# Altium PCB ss-sece.PcbDoc
Units mm, origin at the board's own origin, x right, y up, seen from the top; angles counter-clockwise.
Board outline 74.93 x 91.19 mm, 2 copper layers (Top Layer, Bottom Layer); 61 components, 46 nets, 218 pads, 29 vias.
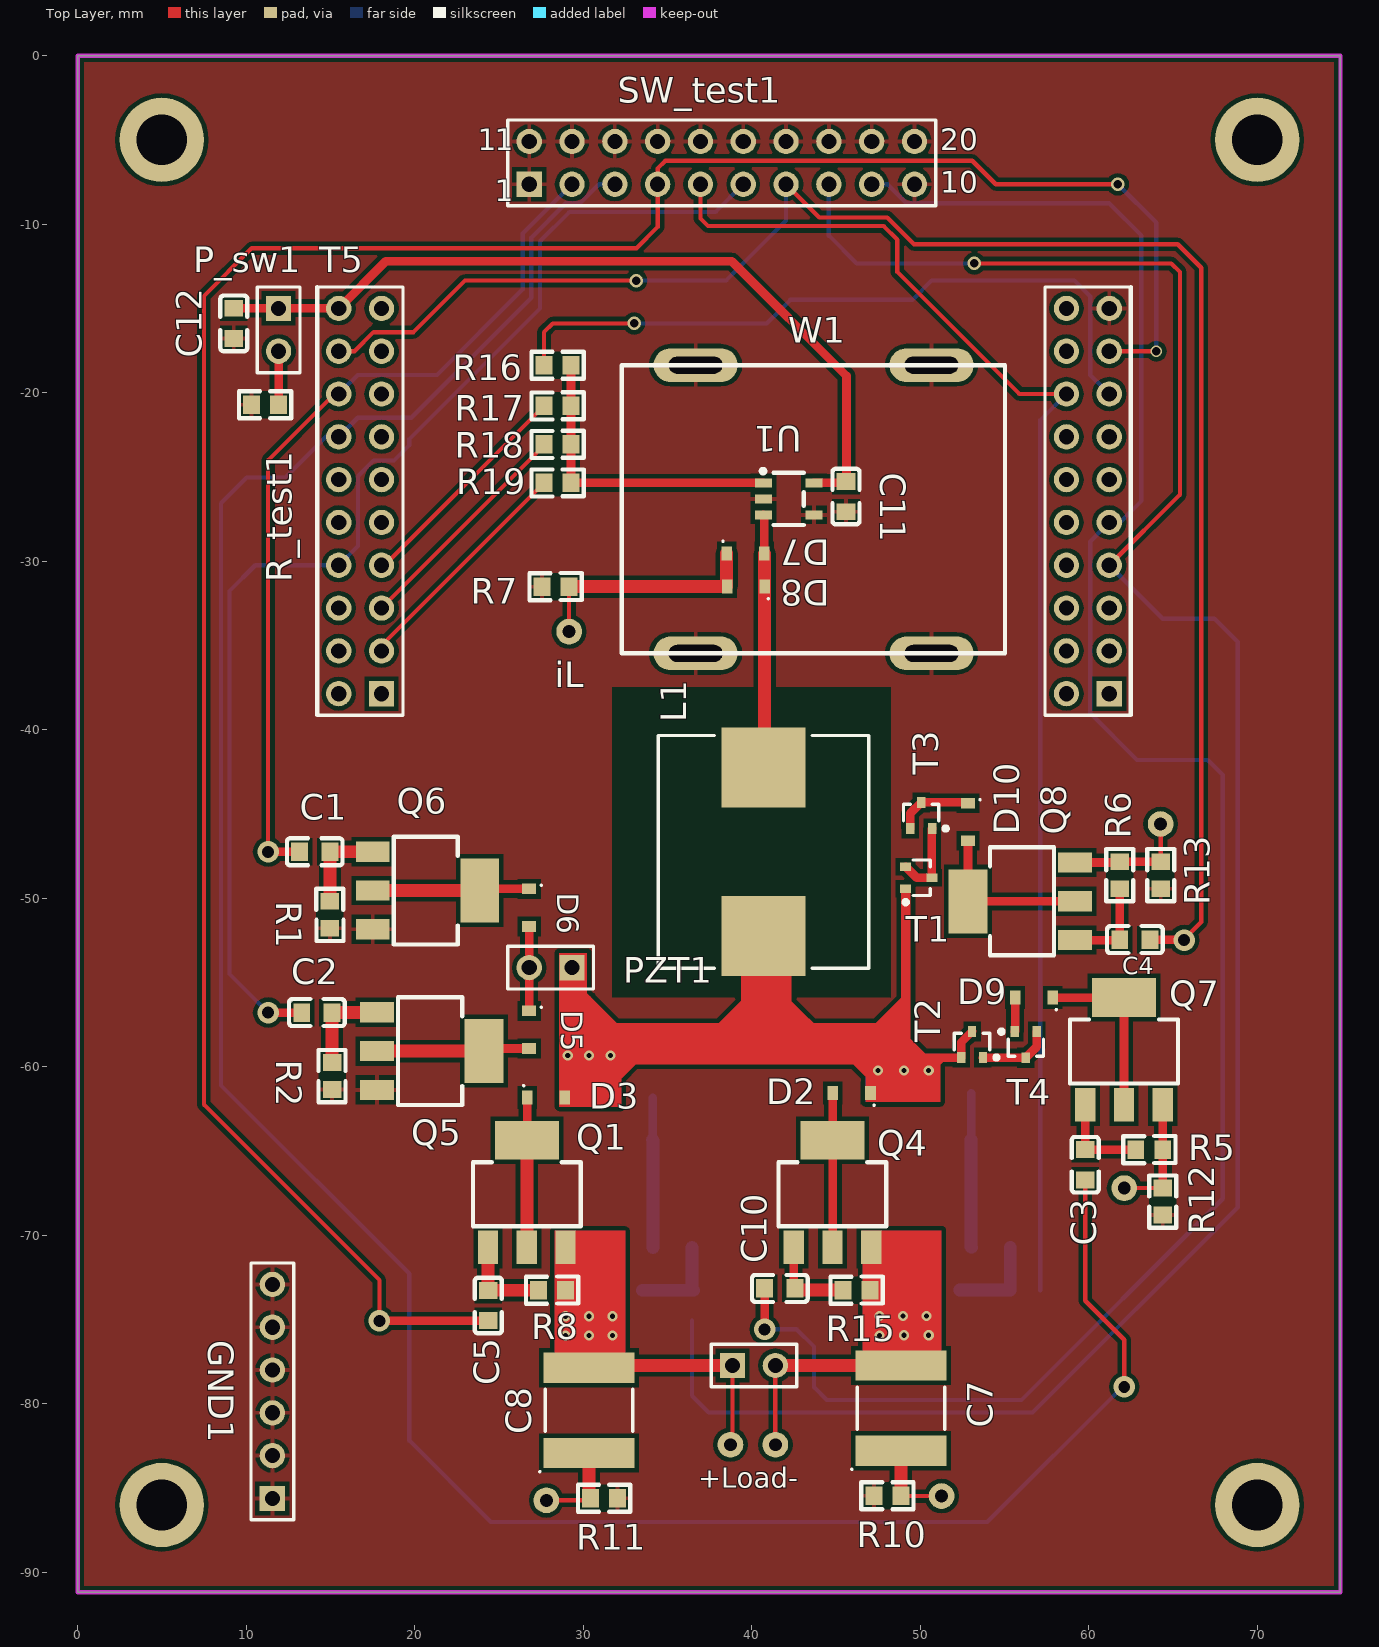
[diagram p0: Top Layer view]
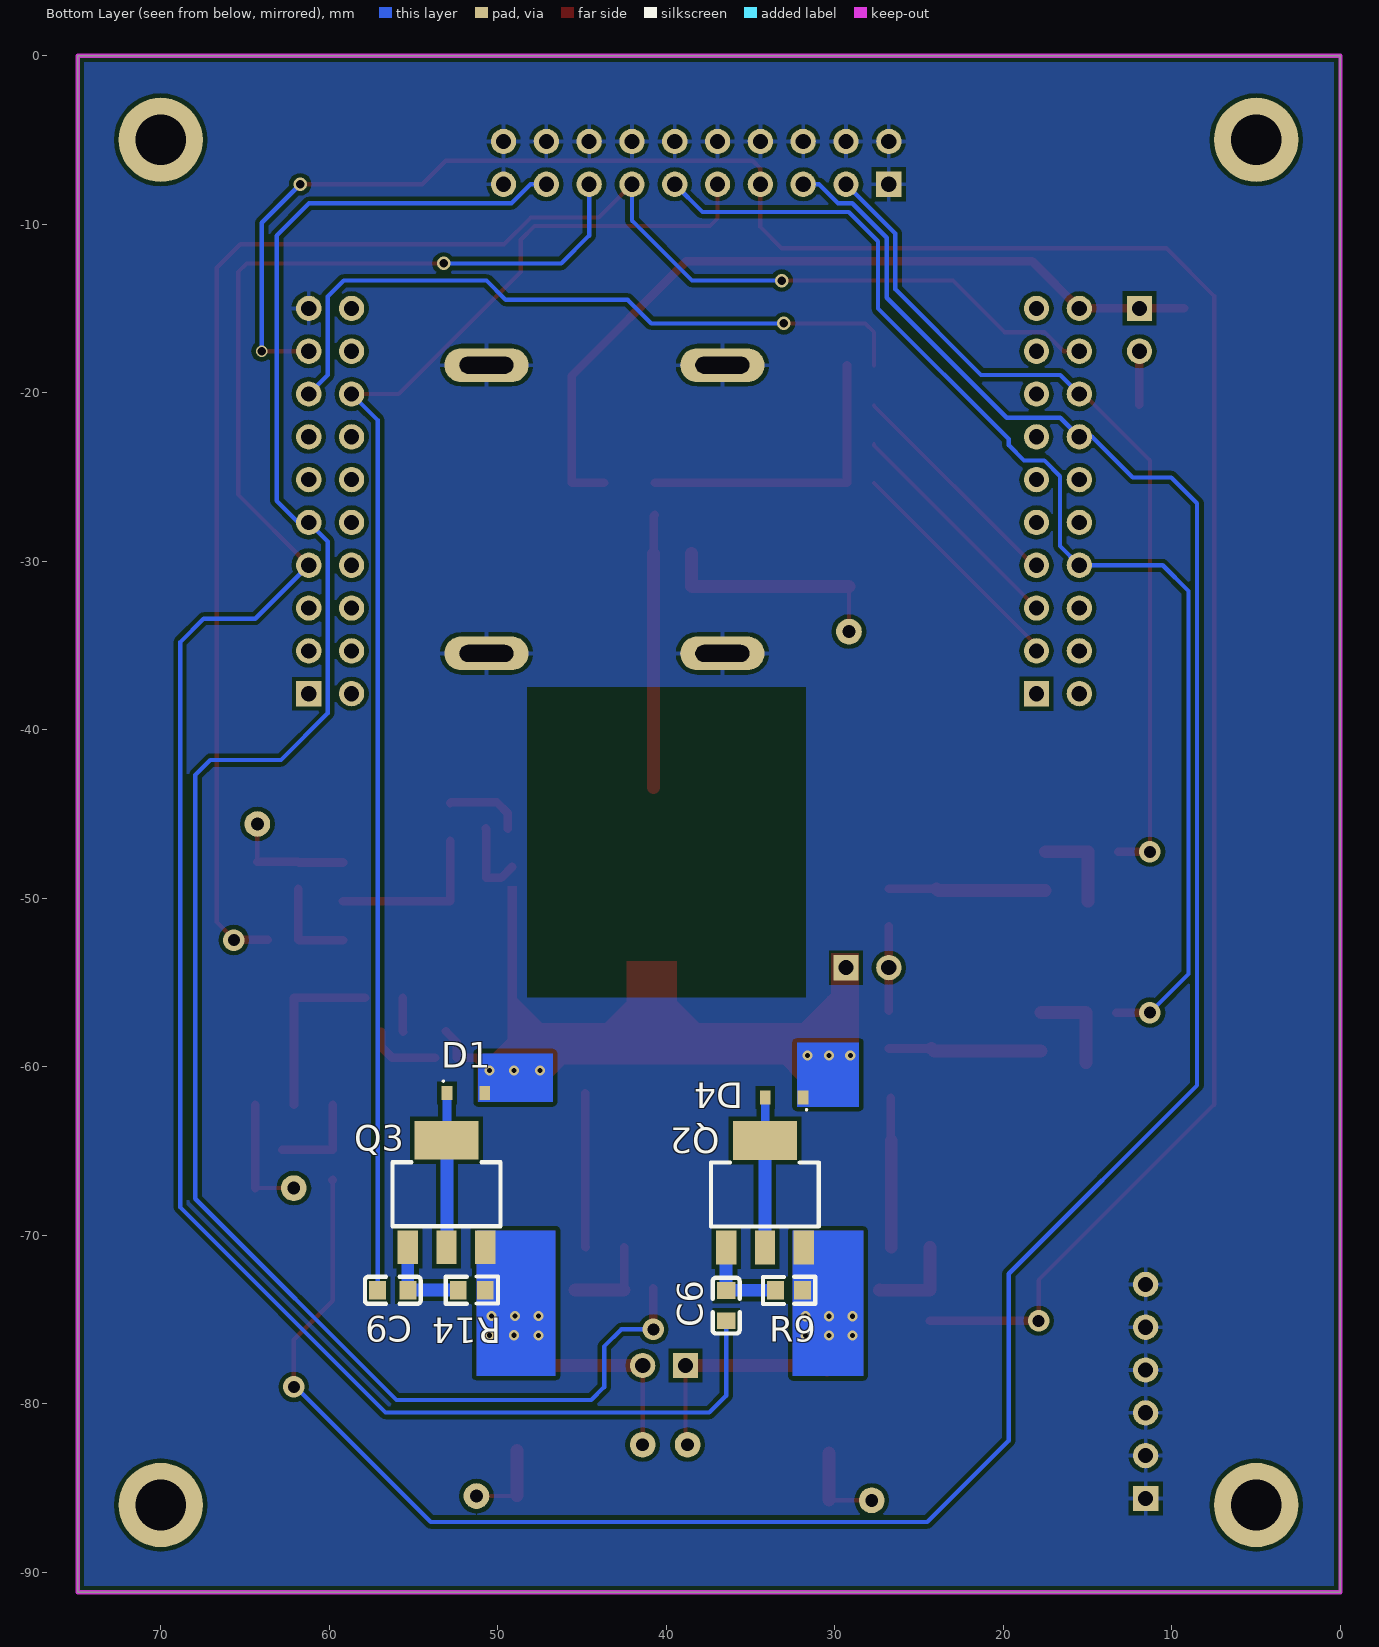
[diagram p1: Bottom Layer view, seen from below]

## Layer stack, top to bottom
Top Solder: solder mask 0.0102, Solder Resist, Dk 3.5
Top Layer: signal copper 0.0356
Dielectric 1: dielectric 0.32, FR-4, Dk 4.8
Bottom Layer: signal copper 0.0356
Bottom Solder: solder mask 0.0102, Solder Resist, Dk 3.5

## Board outline
0,-91.186 74.93,-91.186 74.93,0 0,0

## Design rules (kind name [scope] priority, off if disabled: settings)
Clearance [All] p1: gap=0.254 ignorepadtopadclearanceinfootprint=FALSE except(0: Arc-Hole Track-Hole SMDPad-Hole THPad-Hole Via-Hole Fill-Hole Poly-Hole Region-Hole Text-Hole)
PolygonConnect [All] p1: connectstyle=Relief reliefconductorwidth=0.254 reliefentries=4 polygonreliefangle="90 Angle" airgapwidth=0.254
RoutingVias [All] p1: holewidth=0.711 width=1.27 viastyle="Through Hole" minholewidth=0.2 minwidth=0.4 maxholewidth=0.711 maxwidth=1.27
SolderMaskExpansion [All] p1: expansion=0.102
Width [All] p1: maxlimit=1.27 minlimit=0.254 preferedwidth=0.254 minimp=50.000000 maximp=50.000000 favimp=50.000000
30 further rules are at their usual default settings.

## Components (designator, comment, footprint, x,y, rotation, side; value= is the part's Value field where it differs from the comment)
C1 "2.2n" C0603 14.072,-47.244 r0 top
C2 "2.2n" C0603 14.199,-56.783 r0 top
C3 "2.2n" C0603 59.789,-65.811 r90 top
C4 "2.2n" C0603 62.735,-52.451 r180 top
C5 "2.2n" C0603 24.37,-74.163 r90 top
C6 "2.2n" C0603 36.449,-74.171 r90 bottom
C7 "0.1u" Cap2220 48.85,-80.248 r90 top
C8 "0.1u" Cap2220 30.339,-80.39 r90 top
C9 "2.2n" C0603 56.227,-73.263 r180 bottom
C10 "2.2n" C0603 41.667,-73.151 r0 top
C11 "0.1u" C0603 45.593,-26.165 r270 top
C12 "0.1u" C0603 9.271,-15.889 r270 top
D1 "NSR0240H" SOD-323 51.898,-61.564 r180 bottom
D2 "NSR0240H" SOD-323 45.929,-61.564 r180 top
D3 "NSR0240H" SOD-323 27.799,-61.833 r0 top
D4 "NSR0240H" SOD-323 33.006,-61.833 r0 bottom
D5 "NSR0240H" SOD-323 26.797,-57.799 r270 top
D6 "NSR0240H" SOD-323 26.797,-50.56 r270 top
D7 "NSR0240H" SOD-323 39.624,-29.529 r0 top
D8 "NSR0240H" SOD-323 39.652,-31.51 r180 top
D9 "NSR0240H" SOD-323 56.741,-55.894 r180 top
D10 "NSR0240H" SOD-323 52.832,-45.48 r270 top
GND1 "Header 6" HDR1X6 11.557,-85.612 r90 top
L1 "120uH" 120uH 40.692,-47.244 r90 top
Load1 "Header 2" HDR1X2 38.862,-77.724 r0 top
P_sw1 "Header 2" HDR1X2 11.924,-15 r270 top
PZT1 "Header 2" HDR1X2 29.337,-54.116 r180 top
Q1 "ZVN4424GTA" SOT-223-4_L6.5-W3.5-P2.30-LS7.0-BR 26.656,-67.533 r270 top
Q2 "ZVP4424GTA" SOT-223-4_L6.5-W3.5-P2.30-LS7.0-BR 34.149,-67.548 r270 bottom
Q3 "ZVN4424GTA" SOT-223-4_L6.5-W3.5-P2.30-LS7.0-BR 53.041,-67.533 r270 bottom
Q4 "ZVP4424GTA" SOT-223-4_L6.5-W3.5-P2.30-LS7.0-BR 44.786,-67.533 r270 top
Q5 "ZVP4424GTA" SOT-223-4_L6.5-W3.5-P2.30-LS7.0-BR 20.941,-59.069 r180 top
Q6 "ZVN4424GTA" SOT-223-4_L6.5-W3.5-P2.30-LS7.0-BR 20.687,-49.544 r180 top
Q7 "ZVN4424GTA" SOT-223-4_L6.5-W3.5-P2.30-LS7.0-BR 62.089,-59.069 r270 top
Q8 "ZVP4424GTA" SOT-223-4_L6.5-W3.5-P2.30-LS7.0-BR 56.007,-50.179 r0 top
R1 "10M" R0603 14.972,-50.979 r90 top
R2 "10M" R0603 15.099,-60.555 r90 top
R5 "10M" R0603 63.589,-64.911 r180 top
R6 "10M" R0603 61.835,-48.631 r270 top
R7 "0" R0603 28.363,-31.51 r0 top
R8 "10M" R0603 28.156,-73.248 r180 top
R9 "10M" R0603 32.714,-73.263 r0 bottom
R10 "0" R0603 48.05,-85.455 r0 top
R11 "0" R0603 31.242,-85.598 r180 top
R12 "0" R0603 64.389,-67.997 r90 top
R13 "0" R0603 64.27,-48.631 r90 top
R14 "10M" R0603 51.541,-73.248 r0 bottom
R15 "10M" R0603 46.221,-73.248 r180 top
R16 "0" R0603 28.476,-18.368 r180 top
R17 "0" R0603 28.476,-20.781 r180 top
R18 "0" R0603 28.476,-23.067 r180 top
R19 "0" R0603 28.476,-25.353 r180 top
R_test1 "1k" R0603 11.124,-20.715 r180 top
SW_test1 "Header 10X2A" HDR2X10_CEN 26.797,-7.634 r0 top
T1 "2SC4083" "SOT 323" 49.911,-48.782 r0 top
T2 "2SC4083" "SOT 323" 53.071,-58.675 r90 top
T3 "2SC4083" "SOT 323" 50.053,-45.086 r90 top
T4 "2SC4083" "SOT 323" 56.261,-58.688 r270 top
T5 "TM4C_socket" Tm4c_socket 14.224,-13.73 r0 top locked
U1 "TLV3201AIDBVR" SOT-23-5_L3.0-W1.7-P0.95-LS2.8-BR 42.192,-26.303 r180 top
W1 "L22*W17*H6" L22*W17*H6 55.023,-35.468 r180 top locked

## Footprints (in the part's own frame and the unit in brackets; to place one, negate y for a bottom-side part, rotate by r counter-clockwise, add the part's x,y. Pads: shape width x height; smd on the part's side, far side on the other; paste and mask are expansions set on the pad)
120uH [mm] "Precision Wire Wound Inductor, 2-Leads, Body 13.80x12.50mm, IPC Medium Density"
  rect 4.75x5 smd: 1(-5,0) 2(5,0)
  silkscreen extent -6.9,-6.25 6.9,6.25, body extent -6.9,-6.25 6.9,6.25, height 6
C0603 [mm]
  rect 1x1.1 smd: 1(-0.9,0) 2(0.9,0)
  silkscreen extent -1.65,-0.8 1.65,0.8
Cap2220 [mm]
  rect 1.8x5.4 smd: 1(-2.525,0) 2(2.525,0)
  silkscreen extent -3.69,-2.6 1.25,2.96, body extent -3.05,-2.7 3.05,2.7, height 3.3
HDR1X2 [mm] "Connector; Header; 2 Position"
  rect 1.5x1.5 hole 0.9: 1(0,0)
  round 1.5 hole 0.9: 2(2.54,0)
  silkscreen extent -1.27,-1.27 3.81,1.27
HDR1X6 [mm] "Connector; Header; 6 Position"
  rect 1.5x1.5 hole 0.9: 1(0,0)
  round 1.5 hole 0.9: 2(2.54,0) 3(5.08,0) 4(7.62,0) 5(10.16,0) 6(12.7,0)
  silkscreen extent -1.27,-1.27 13.97,1.27
HDR2X10_CEN [mm] "Connector; Header; 10x2 Position"
  rect 1.5x1.5 hole 0.9: 1(0,0)
  round 1.5 hole 0.9: 2(2.54,0) 3(5.08,0) 4(7.62,0) 5(10.16,0) 6(12.7,0) 7(15.24,0) 8(17.78,0) 9(20.32,0) 10(22.86,0) 11(0,2.54) 12(2.54,2.54) 13(5.08,2.54) 14(7.62,2.54) 15(10.16,2.54) 16(12.7,2.54) 17(15.24,2.54) 18(17.78,2.54) 19(20.32,2.54) 20(22.86,2.54)
  silkscreen extent -1.27,-1.27 24.13,3.81
L22*W17*H6 [mm]
  oval 5x2 hole 1 slot 3.2 at 0 deg: 1(4.35,0) 2(18.35,0) 3(18.35,-17.1) 4(4.35,-17.1)
  silkscreen extent 0,-17.1 22.73,0
R0603 [mm]
  rect 1x1.1 smd: 1(-0.8,0) 2(0.8,0)
  silkscreen extent -1.55,-0.8 1.55,0.81
SOD-323 [mm] "NSR0240H"
  rect 0.63x0.83 smd: 1(-1.115,0) 2(1.115,0)
  silkscreen extent -1.38,0.67 -1.28,0.76, body extent -0.9,-0.67 0.9,0.67, height 0.9
"SOT 323" [mm] "2SC4083T106N"
  rect 0.65x0.5 smd: 1(-0.775,-0.65) 2(-0.775,0.65) 3(0.775,0)
  silkscreen extent -0.9,-1.57 0.67,1.05, body extent -0.67,-1.05 0.67,1.05, height 1
SOT-23-5_L3.0-W1.7-P0.95-LS2.8-BR [mm]
  rect 1x0.55 smd: 1(1.5,-0.95) 2(1.5,0) 3(1.5,0.95) 4(-1.5,0.95) 5(-1.5,-0.95)
  silkscreen extent -0.9,-1.78 1.65,1.55
SOT-223-4_L6.5-W3.5-P2.30-LS7.0-BR [mm]
  rect 2x1.2 smd: 1(3.175,-2.3) 2(3.175,0) 3(3.175,2.3)
  rect 2.3x3.8 smd: 4(-3.175,0)
  silkscreen extent -1.87,-3.2 1.93,3.2
Tm4c_socket [mm]
  round 1.5 hole 0.9: 1(1.27,-1.27) 2(1.27,-3.81) 3(1.27,-6.35) 4(1.27,-8.89) 5(1.27,-11.43) 6(1.27,-13.97) 7(1.27,-16.51) 8(1.27,-19.05) 9(1.27,-21.59) 10(1.27,-24.13) 11(3.81,-1.27) 12(3.81,-3.81) 13(3.81,-6.35) 14(3.81,-8.89) 15(3.81,-11.43) 16(3.81,-13.97) 17(3.81,-16.51) 18(3.81,-19.05) 19(3.81,-21.59) 21(44.45,-1.27) 22(44.45,-3.81) 23(44.45,-6.35) 24(44.45,-8.89) 25(44.45,-11.43) 26(44.45,-13.97) 27(44.45,-16.51) 28(44.45,-19.05) 29(44.45,-21.59) 30(44.45,-24.13) 31(46.99,-1.27) 32(46.99,-3.81) 33(46.99,-6.35) 34(46.99,-8.89) 35(46.99,-11.43) 36(46.99,-13.97) 37(46.99,-16.51) 38(46.99,-19.05) 39(46.99,-21.59)
  rect 1.5x1.5 hole 0.9: 20(3.81,-24.13) 40(46.99,-24.13)
  silkscreen extent 0,-25.4 48.26,0

## Part data
C1 C2 C3 C4 C5 C6 C9 C10: library part 0.1u, Contributor=LCEDA_Lib, nameAlias=Value(F), spicePre=C, spiceSymbolName=C_0603_US
GND1: "Header, 6-Pin", LatestRevisionDate=17-Jul-2002, LatestRevisionNote="Re-released for DXP Platform.", Publisher="Altium Limited"
L1: library part 47uH, BOM_Manufacturer=FH, BOM_Manufacturer Part=VLU1012-470KB, BOM_Supplier=LCSC, BOM_Supplier Part=C142466, Contributor=LCSC, nameAlias=Inductance, spicePre=L, spiceSymbolName=VLU1012-470KB
Load1 P_sw1 PZT1: "Header, 2-Pin", LatestRevisionDate=17-Jul-2002, LatestRevisionNote="Re-released for DXP Platform.", Publisher="Altium Limited"
Q1 Q3 Q6 Q7: BOM_Manufacturer="Diodes Incorporated", BOM_Manufacturer Part=ZVP4424GTA, BOM_Supplier=LCSC, BOM_Supplier Part=C397967, Contributor=LCSC, spicePre=Q, spiceSymbolName=ZVP4424GTA
Q2 Q4 Q5 Q8: BOM_Manufacturer="Diodes Incorporated", BOM_Manufacturer Part=ZVP4424GTA, BOM_Supplier=LCSC, BOM_Supplier Part=C397967, Contributor=LCSC, spicePre=Q, spiceSymbolName=ZVP4424GTA
R1 R2 R5 R6 R7 R8 R9 R10 R11 R12 R13 R14 R15 R16 R17 R18 R19: library part 1k, Contributor=LCEDA_Lib, spicePre=R, spiceSymbolName=R_1206_US
SW_test1: "Header, 10-Pin, Dual row", LatestRevisionDate=17-Jul-2002, LatestRevisionNote="Re-released for DXP Platform.", Publisher="Altium Limited"
T5: library part Tm4c_socket
U1: BOM_LCSC Assembly=Yes, BOM_Manufacturer=TI, BOM_Manufacturer Part=TLV3201AIDBVR, BOM_Supplier=LCSC, BOM_Supplier Part=C105188, SMT Type=Extend, spicePre=U, spiceSymbolName=TLV3201AIDBVR
C7 C8 C11 C12: Contributor=LCEDA_Lib, nameAlias=Value(F), spicePre=C, spiceSymbolName=C_0603_US
R_test1: Contributor=LCEDA_Lib, spicePre=R, spiceSymbolName=R_1206_US

## Free pads (board coordinates)
  round 5 hole 3: 4(5,-86) 4(5,-5) 4(70,-86) 4(70,-5)
  round 1.524 hole 0.762: 5(29.163,-34.177) 6(27.813,-85.725) 6(51.263,-85.471) 7(38.735,-82.423) 8(41.402,-82.423) 8(62.103,-67.197) 8(64.262,-45.593)

## Via types
v1: diameter 0.6, hole 0.3, Top Layer to Bottom Layer, tented both sides, 18 vias
v2: diameter 1.27, hole 0.711, Top Layer to Bottom Layer, tented both sides, 6 vias
v3: diameter 0.8, hole 0.5, Top Layer to Bottom Layer, tented both sides, 3 vias
v4: diameter 0.7, hole 0.5, Top Layer to Bottom Layer, tented both sides, 1 vias
v5: diameter 0.8, hole 0.5, Top Layer to Bottom Layer, tented top, 1 vias

## Nets (pads, with @x,y where several pads share a name; then routed paths per layer and width w, separated by ;. In a path a pad name is that pad's centre, name@x,y a point inside that pad or via, vN(x,y) a via of type N, cw(c..) or ccw(c..) an arc to the next point about the centre after c; other vN are vias at no path point)
3.3V: C11.1 C12.1 P_sw1.1 T5.1 U1.5 | length 59.2
  Top Layer w0.508: C12.1 9.282,-15 P_sw1.1 P_sw1.1@11.902,-14.978 ; P_sw1.1@11.902,-14.978 14.13,-14.978 ; P_sw1.1@11.902,-14.978 14.13,-14.978 ; 14.13,-14.978 14.152,-15 T5.1 18.288,-12.206 38.817,-12.206 45.621,-19.01 ; C11.1@45.621,-25.353 45.621,-19.01 ; C11.1@45.621,-25.353 U1.5 C11.1@45.621,-25.353 ; C11.1@45.621,-25.353 45.621,-19.01
Det: D7.2 D8.1 L1.2 U1.3 | length 16.2
  Top Layer w0.508: U1.3 40.739,-27.3 D7.2 D7.2@40.767,-29.557
  Top Layer w0.762: L1.2@40.767,-43.434 D8.1 D7.2@40.767,-29.557
GND: C11.2 C12.2 GND1.1 GND1.2 GND1.3 GND1.4 GND1.5 GND1.6 Q5.3 Q6.3 R1.1 R2.1 R7.1 R10.1 R11.1 R12.1 R13.1 R_test1.2 SW_test1.1 SW_test1.10 SW_test1.11 SW_test1.12 SW_test1.13 SW_test1.14 SW_test1.15 SW_test1.16 SW_test1.17 SW_test1.18 SW_test1.19 SW_test1.20 T5.31 U1.2 U1.4 W1.1 W1.2 W1.3 W1.4
I1: R16.2 T5.33 | length 42.3
  Top Layer w0.254: R16.2 27.676,-16.407 28.194,-15.889 v3(33.02,-15.889)
  Bottom Layer w0.254: v3(33.02,-15.889) 40.894,-15.889 42.291,-14.492 49.53,-14.492 50.673,-13.349 59.142,-13.349 60.083,-14.289 60.083,-18.949 T5.33
I2: R17.2 T5.17 | length 13.6
  Top Layer w0.254: T5.17 18.217,-30.24 R17.2
I3: R18.2 T5.18 | length 13.7
  Top Layer w0.254: T5.18 27.676,-23.138 R18.2
I4: R19.2 T5.19 | length 14
  Top Layer w0.254: T5.19 18.034,-34.995 R19.2
Load+: C8.2 Load1.1 pad.7 Q1.3 Q2.3 R8.1 R9.1 | length 12.7
  Top Layer w0.254: pad.7 38.862,-82.296 Load1.1
  Top Layer w0.762: C8.2@30.354,-77.85 C8.2 30.466,-77.992 30.735,-77.723 38.1,-77.723
  other v1: 28.942,-75.945 30.339,-75.945 31.736,-75.945 28.942,-74.802 30.339,-74.802 31.736,-74.802
Load-: C7.2 Load1.2 pad.8@41.402,-82.423 Q3.3 Q4.3 R14.1 R15.1 | length 14.7
  Top Layer w0.254: pad.8@41.402,-82.423 Load1.2
  Top Layer w0.762: Load1.2 C7.2
  Bottom Layer w0.762: R14.1 Q3.3
  other v1: 47.58,-75.945 49.033,-75.93 50.501,-75.93 47.58,-74.787 48.977,-74.787 50.374,-74.787
NetC7_1: C7.1 pad.6@51.263,-85.471 R10.2 | length 5.1
  Top Layer w0.254: R10.2 48.866,-85.471 pad.6@51.263,-85.471
  Top Layer w0.762: R10.2 C7.1
NetC8_1: C8.1 pad.6@27.813,-85.725 R11.2 | length 5.3
  Top Layer w0.254: pad.6@27.813,-85.725 30.323,-85.725 R11.2@30.339,-85.709
  Top Layer w0.762: R11.2@30.339,-85.709 C8.1
NetD1_1: D1.1 Q3.2 Q3.4 | length 15.5
  Bottom Layer w0.508: Q3.4@53.013,-64.33 D1.1
  Bottom Layer w0.762: Q3.2 Q3.2@53.013,-70.68 ; Q3.2@53.013,-70.68 Q3.4@53.013,-64.358 ; Q3.2@53.013,-70.68 Q3.4@53.013,-64.358 ; Q3.4@53.013,-64.358 53.013,-64.33 Q3.4@53.013,-64.358
NetD2_2: D2.2 Q4.2 Q4.4 | length 18.3
  Top Layer w0.508: Q4.2 Q4.2@44.814,-70.68 ; Q4.2@44.814,-70.68 D2.2 Q4.2@44.814,-70.68
NetD3_1: D3.1 Q1.2 Q1.4 | length 8.9
  Top Layer w0.254: Q1.4 Q1.4@26.684,-64.33
  Top Layer w0.508: Q1.4@26.684,-64.33 D3.1
  Top Layer w0.762: Q1.2 Q1.4
NetD4_2: D4.2 Q2.2 Q2.4 | length 8.9
  Bottom Layer w0.508: Q2.4@34.121,-64.345 D4.2
  Bottom Layer w0.762: Q2.4@34.121,-64.345 Q2.4 Q2.2
NetD5_2: D5.2 Q5.2 Q5.4 | length 9.1
  Top Layer w0.508: Q5.4@24.271,-58.914 D5.2
  Top Layer w0.762: Q5.2 Q5.4 Q5.4@24.271,-58.914
NetD6_1: D6.1 Q6.2 Q6.4 | length 9.3
  Top Layer w0.508: Q6.4@23.961,-49.445 D6.1
  Top Layer w0.762: Q6.2 Q6.4 Q6.4@23.961,-49.445
NetD7_1: D7.1 D8.2 pad.5 R7.2 | length 14
  Top Layer w0.254: pad.5 R7.2
  Top Layer w0.762: R7.2 38.481,-31.51 38.509,-31.482 D7.1
NetD9_1: D9.1 Q7.2 Q7.4 | length 10.6
  Top Layer w0.508: D9.1 Q7.4 Q7.2
NetD9_2: D9.2 T4.1 | length 2
  Top Layer w0.508: T4.1 55.626,-57.898 D9.2
NetD10_1: D10.1 T3.2 T3.3 | length 4.6
  Top Layer w0.508: T3.2 49.403,-44.961 T3.3 52.778,-44.311 D10.1
NetD10_2: D10.2 Q8.2 Q8.4 | length 9.9
  Top Layer w0.508: D10.2 Q8.4 Q8.2
NetP_sw1_2: P_sw1.2 R_test1.1 | length 3.2
  Top Layer w0.508: R_test1.1 P_sw1.2
NetR16_1: R16.1 R17.1 R18.1 R19.1 U1.1 | length 18.4
  Top Layer w0.508: R16.1 R17.1 R18.1 R19.1 U1.1
NetT1_2: T1.2 T1.3 T3.1 | length 4.7
  Top Layer w0.508: T1.2 49.786,-48.782 T1.3 50.686,-45.878 T3.1
NetT2_1: T2.1 T4.2 T4.3 | length 4.4
  Top Layer w0.508: T2.1 56.248,-59.45 T4.3 56.911,-58.813 T4.2
PZT+: D1.2 D2.1 D3.2 D4.1 L1.1 PZT1.1 T1.1 T2.2 T2.3 | length 3.9
  Top Layer w0.508: 50.292,-59.45 T2.2 52.421,-58.55 T2.3
  other v1: 47.498,-60.212 49.033,-60.212 50.501,-60.212 29.083,-59.323 30.339,-59.323 31.623,-59.323
PZT-: D5.1 D6.2 PZT1.2 | length 5
  Top Layer w0.508: D5.1 PZT1.2 D6.2
S1+: C1.1 SW_test1.2 T5.3 | length 51.9
  Top Layer w0.254: v2(11.303,-47.244) 11.303,-24.017 T5.3@15.24,-20.08
  Top Layer w0.508: v2(11.303,-47.244) C1.1
  Bottom Layer w0.254: T5.3@15.24,-20.08 T5.3 16.625,-18.949 21.324,-18.949 26.416,-13.857 26.416,-10.555 SW_test1.2
S1+_G: C1.2 Q6.1 R1.2 | length 5.5
  Top Layer w0.762: R1.2 C1.2 Q6.1
S1-: C2.1 SW_test1.6 T5.7 | length 73.4
  Top Layer w0.508: v2(11.303,-56.783) C2.1
  Bottom Layer w0.254: v2(11.303,-56.783) 9.017,-54.497 9.017,-31.764 10.541,-30.24 T5.7 16.637,-29.097 16.637,-24.957 17.566,-24.029 18.77,-24.029 19.685,-23.114 19.685,-22.747 27.432,-15 27.432,-11.019 29.178,-9.273 37.858,-9.273 SW_test1.6
S1-_G: C2.2 Q5.1 R2.2 | length 5.6
  Top Layer w0.762: R2.2 C2.2 15.113,-56.769 Q5.1
S2+: C3.1 SW_test1.3 T5.4 | length 154.6
  Top Layer w0.254: C3.1 59.789,-73.886 62.103,-76.2 v2(62.103,-78.994)
  Top Layer w0.508: C3.1 C3.1@59.817,-66.739
  Bottom Layer w0.254: SW_test1.3 30.936,-7.634 29.805,-8.765 28.968,-8.765 26.924,-10.809 26.924,-14.365 19.8,-21.489 16.625,-21.489 T5.4 14.732,-22.62 12.319,-25.033 10.033,-25.033 8.509,-26.557 8.509,-61.101 19.685,-72.277 19.685,-82.183 24.511,-87.009 53.975,-87.009 61.99,-78.994 v2(62.103,-78.994)
S2+_G: C3.2 Q7.1 R5.2 | length 5.7
  Top Layer w0.508: Q7.1 C3.2 R5.2
S2+_S: pad.8@62.103,-67.197 Q7.3 R5.1 R12.2 | length 7.2
  Top Layer w0.254: pad.8@62.103,-67.197 R12.2
  Top Layer w0.508: R12.2 R5.1 Q7.3
S2-: C4.1 SW_test1.7 T5.2 | length 100.9
  Top Layer w0.254: T5.2 16.435,-17.54 17.566,-16.409 19.927,-16.409 22.987,-13.349 v5(33.147,-13.349) ; SW_test1.7 44.005,-9.602 48.037,-9.602 49.624,-11.19 65.278,-11.19 66.675,-12.587 66.675,-51.407 v2@65.631,-52.451
  Top Layer w0.508: C4.1 v2@65.631,-52.451
  Bottom Layer w0.254: v5(33.147,-13.349) 38.481,-13.349 42.037,-9.793 SW_test1.7
  other v2: 65.659,-52.479
S2-_G: C4.2 Q8.1 R6.2 | length 5.7
  Top Layer w0.508: Q8.1 61.807,-52.479 C4.2 R6.2
S2-_S: pad.8@64.262,-45.593 Q8.3 R6.1 R13.2 | length 7.3
  Top Layer w0.254: pad.8@64.262,-45.593 64.27,-45.601 R13.2
  Top Layer w0.508: Q8.3 61.787,-47.879 R6.1 R13.2
S3+: C5.1 SW_test1.4 T5.32 | length 145.4
  Top Layer w0.254: v2(17.907,-75.071) 17.907,-72.658 7.493,-62.244 7.493,-14.263 10.326,-11.43 33.161,-11.43 34.417,-10.174 SW_test1.4 34.417,-6.693 34.873,-6.237 53.086,-6.237 54.483,-7.634 ; 54.5,-7.634 v3(61.722,-7.634) ; T5.32 v4(64.008,-17.54)
  Top Layer w0.508: v2(17.907,-75.071) 24.362,-75.071 C5.1
  Bottom Layer w0.254: v3(61.722,-7.634) 64.008,-9.92 v4(64.008,-17.54)
S3+_G: C5.2 Q1.1 R8.2 | length 5.6
  Top Layer w0.762: Q1.1 24.356,-73.249 C5.2 27.341,-73.263 R8.2
S3-: C6.1 SW_test1.8 T5.37 | length 129.2
  Top Layer w0.254: v3(53.213,-12.333) 64.897,-12.333 65.405,-12.841 65.405,-26.049 T5.37
  Bottom Layer w0.254: C6.1 36.449,-79.516 37.451,-80.518 56.656,-80.518 68.834,-68.34 68.834,-66.664 68.834,-34.798 67.451,-33.415 64.389,-33.415 T5.37 ; SW_test1.8 44.577,-10.682 46.228,-12.333 v3(53.213,-12.333)
S3-_G: C6.2 Q2.1 R9.2 | length 5.6
  Bottom Layer w0.762: R9.2 36.551,-73.263 36.449,-73.161 Q2.1
S4+: C9.1 SW_test1.5 T5.23 | length 83.4
  Top Layer w0.254: SW_test1.5 36.957,-9.666 37.401,-10.11 47.826,-10.11 48.641,-10.925 48.641,-12.841 55.88,-20.08 56.896,-20.08 ; 57.277,-20.08 56.896,-20.08 ; T5.23 56.896,-20.08
  Bottom Layer w0.254: C9.1 57.127,-21.627 T5.23
S4+_G: C9.2 Q3.1 R14.2 | length 5.6
  Bottom Layer w0.762: R14.2 55.312,-73.248 C9.2 55.341,-73.249 Q3.1
S4-: C10.1 SW_test1.9 T5.36 | length 119.4
  Top Layer w0.508: v2(40.767,-75.579) C10.1
  Bottom Layer w0.254: v2(40.767,-75.579) 42.672,-75.579 43.688,-76.595 43.688,-79.008 44.45,-79.77 56.007,-79.77 67.945,-67.832 67.945,-42.686 67.056,-41.797 62.865,-41.797 60.083,-39.015 60.083,-28.831 T5.36 61.837,-27.7 63.119,-26.418 63.119,-10.682 61.202,-8.765 49.189,-8.765 48.058,-7.634 SW_test1.9
S4-_G: C10.2 Q4.1 R15.2 | length 8.4
  Top Layer w0.508: Q4.1 42.486,-73.07 C10.2
  Top Layer w0.762: C10.2 C10.2@42.515,-73.248 ; C10.2@42.515,-73.248 R15.2 C10.2@42.515,-73.248
pads on no net: T5.5 T5.6 T5.8 T5.9 T5.10 T5.11 T5.12 T5.13 T5.14 T5.15 T5.16 T5.20 T5.21 T5.22 T5.24 T5.25 T5.26 T5.27 T5.28 T5.29 T5.30 T5.34 T5.35 T5.38 T5.39 T5.40

## Polygon pours and split planes (outlines as drawn)
GND on Top Layer (solid, pour order 8): 0,0 74.93,0 74.93,-91.186 0,-91.186
GND on Bottom Layer (solid, pour order 10): 0,0 74.93,0 74.93,-91.186 0,-91.186

## Keep-outs
Keep-Out Layer:
  the board outline again, w0.254

## Other copper
Top Layer:
  rectangle net PZT+: 48.85,-57.531 49.431,-49.276
  region net PZT+: 48.22,-58.587 49.403,-57.404 48.768,-56.769 47.585,-57.952
  region net PZT+: 46.819,-59.293 49.348,-56.764 48.895,-56.311 46.366,-58.84
  region net PZT+: 46.87,-58.418 49.399,-55.889 49.136,-55.626 46.607,-58.155
  region net PZT+: 38.555,-59.538 41.084,-57.009 39.751,-55.676 37.222,-58.205
  region net PZT+: 43.755,-59.608 44.814,-58.55 41.94,-55.676 40.882,-56.735
  rectangle net PZT+: 28.575,-59.897 30.466,-55.833
  region net PZT+: 30.988,-58.674 32.131,-57.531 29.796,-55.196 28.653,-56.339
  rectangle net PZT+: 39.37,-57.785 42.359,-53.721
  rectangle net PZT+: 28.575,-56.543 30.226,-53.241
  rectangle net PZT+: 28.575,-59.867 49.431,-57.404
  region net PZT+: 50.237,-60.839 51.494,-59.582 51.186,-59.273 49.929,-60.53
  region net PZT+: 32.076,-60.905 33.333,-59.648 32.186,-58.5 30.929,-59.757
  region net PZT+: 46.808,-60.651 48.065,-59.394 46.918,-58.246 45.661,-59.503
  region net PZT+: 49.094,-60.524 50.351,-59.267 49.204,-58.119 47.947,-59.376
  rectangle net PZT+: 46.747,-62.102 51.192,-59.196
  rectangle net PZT+: 28.575,-62.371 32.258,-58.119
  rectangle net Load-: 46.564,-78.343 51.263,-69.707
  rectangle net Load+: 28.307,-78.358 32.498,-69.722
  pour cut-out: 31.725,-37.465 48.249,-37.465 48.249,-55.894 48.235,-55.88 31.725,-55.88
  pour cut-out: 31.736,-38.608
Bottom Layer:
  rectangle net PZT+: 28.561,-62.371 32.258,-58.561
  rectangle net PZT+: 46.733,-62.102 51.178,-59.196
  rectangle net Load-: 46.564,-78.343 51.263,-69.707
  rectangle net Load+: 28.307,-78.358 32.498,-69.722
  pour cut-out: 31.736,-37.465 48.246,-37.465 48.246,-55.88 31.736,-55.88

## Silkscreen, mask and mechanical layers (free items; w line width, h text height)
Top Overlay:
  text "iL" at 28.321,-37.465 h1.52
  text "+Load-" at 36.816,-84.963 h1.2

## Text inside footprints (layer, text, board x,y; h text height)
SW_test1: Top Overlay "1" at 24.765,-8.65 h1.27; Top Overlay "1" at 23.749,-5.602 h1.27; Top Overlay "1" at 24.765,-5.602 h1.27; Top Overlay "10" at 51.181,-8.142 h1.27; Top Overlay "20" at 51.181,-5.602 h1.27